# Altium PCB ROS_CAR.PcbDoc (part 13 of 13)
Units mil, origin at the board's own origin, x right, y up, seen from the top; angles counter-clockwise.
Board outline 3937.01 x 3937.01 mil, 2 copper layers (Top Layer, Bottom Layer); 201 components, 155 nets, 998 pads, 0 vias.
Unrouted connection lines stored in the file: 3.
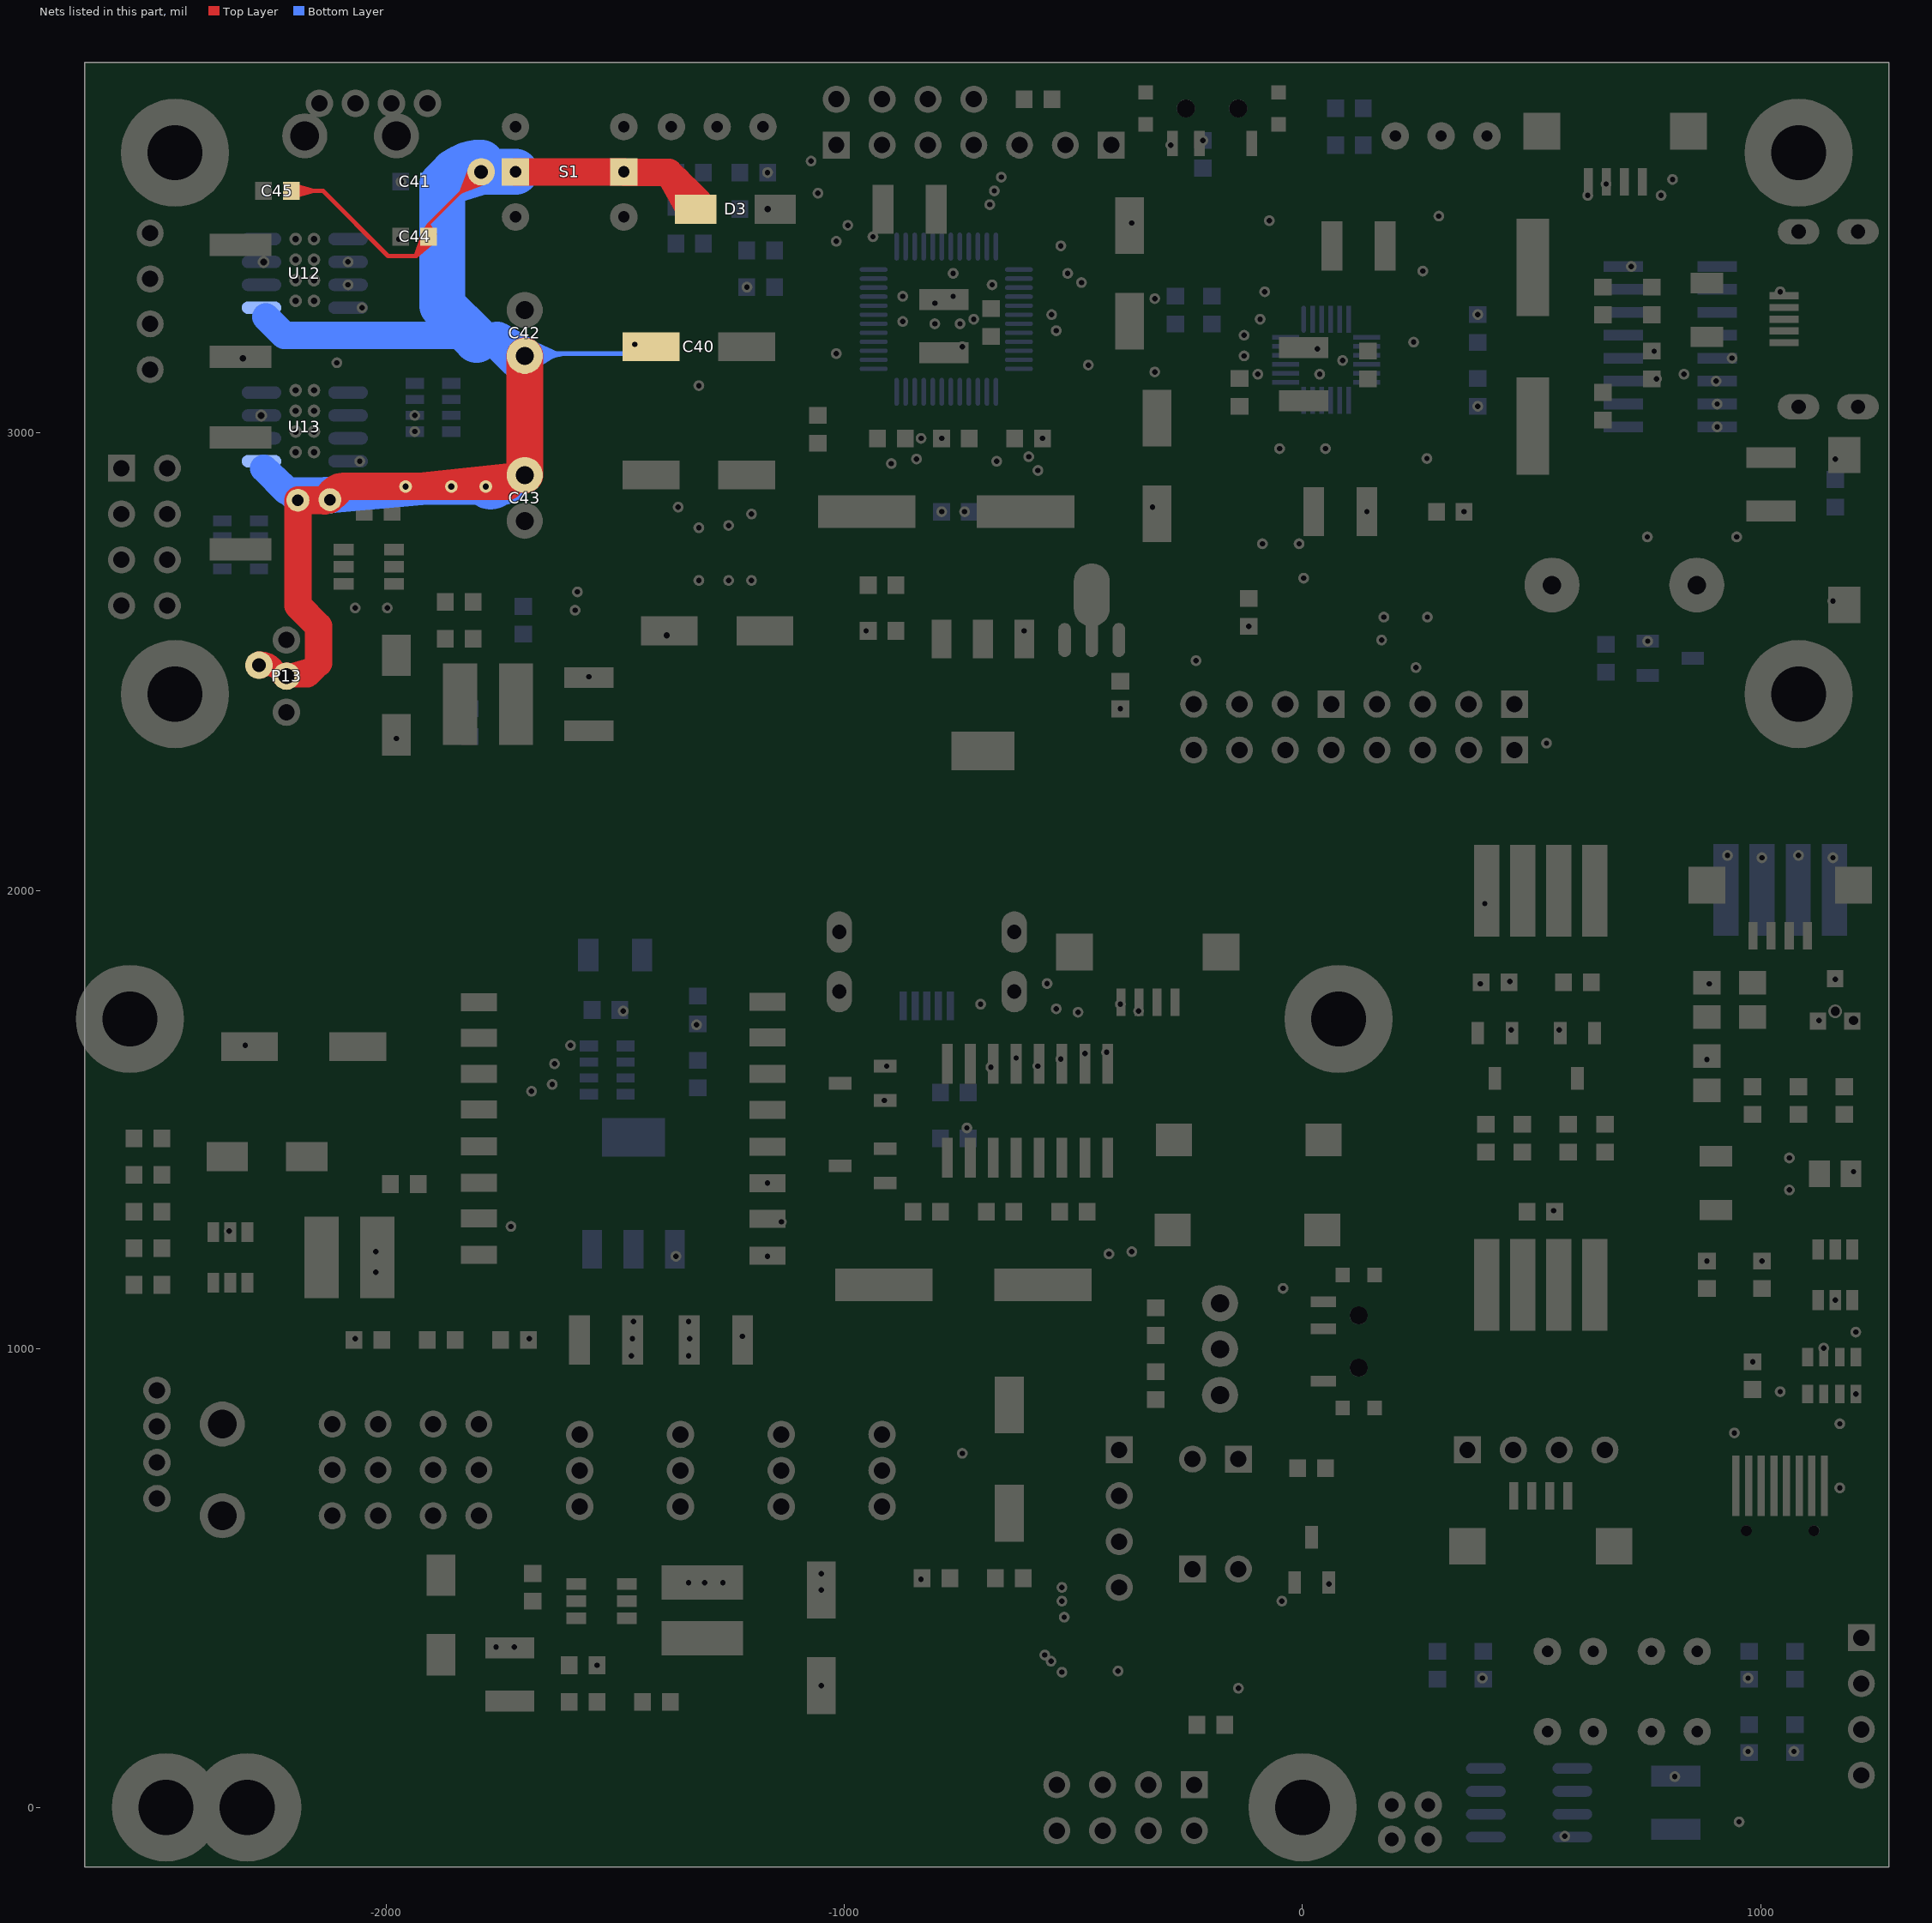
[diagram p13: the nets of this part, all layers, seen from the top]

## Nets (pads, with @x,y where several pads share a name; then routed paths per layer and width w, separated by ;. In a path a pad name is that pad's centre, name@x,y a point inside that pad or via, vN(x,y) a via of type N, cw(c..) or ccw(c..) an arc to the next point about the centre after c; other vN are vias at no path point) (continued)
VINM9V: C40.1 C41.1 C42.1 C43.1 C44.1 C45.1 D3.1 P13.2 pad.0@-1792.48,3568.66 pad.1@-1457.48,3192.09 pad.3 pad.11@-1782.48,2882.09 pad.11@-1857.48,2882.09 pad.11@-1957.48,2882.09 pad.11@-2122.48,2853.3 pad.11@-2192.48,2852.09 S1.1 U12.5 U13.5 | length 14288.3
  Top Layer w7: C44.1@-1921.35,3432.3 -1907.16,3453.98 ; C44.1@-1914.88,3429.25 -1907.16,3453.98 ; C44.1@-1914.68,3440.83 ccw(c-1922.42,3453.98) -1907.16,3453.98 ; C44.1@-1907.16,3427.09 -1907.16,3453.98 ; C44.1@-1907.16,3428.07 -1907.16,3453.98 ; C44.1@-1899.65,3440.83 cw(c-1891.91,3453.98) -1907.16,3453.98 ; C44.1@-1899.45,3429.25 -1907.16,3453.98 ; C44.1@-1892.97,3432.3 -1907.16,3453.98 ; pad.0@-1818.98,3568.66 cw(c-1882.96,3568.66) -1837.72,3523.42 cw(c-1792.48,3478.18) pad.0@-1792.48,3542.16 ; pad.0@-1814.72,3583.07 -1837.33,3523.81 ; pad.0@-1811.98,3568.66 cw(c-1859.06,3568.66) -1825.77,3535.37 cw(c-1792.48,3502.08) pad.0@-1792.48,3549.16 ; pad.0@-1808.22,3580.17 -1837.33,3523.81 ; pad.0@-1804.98,3568.66 cw(c-1835.16,3568.66) -1813.82,3547.32 cw(c-1792.48,3525.98) pad.0@-1792.48,3556.16 ; pad.0@-1802.15,3576.59 -1837.33,3523.81 ; pad.0@-1796.53,3572.38 -1837.33,3523.81 ; pad.0@-1792.48,3568.66 -1907.16,3453.98 ; pad.0@-1788.76,3564.61 -1837.33,3523.81 ; pad.0@-1784.56,3558.99 -1837.33,3523.81 ; pad.0@-1780.98,3552.92 -1837.33,3523.81 ; pad.0@-1778.07,3546.42 -1837.33,3523.81
  Top Layer w10: C45.1@-2207.17,3527.09 -2137.48,3527.09 -1995.48,3385.09 -1934.48,3385.09 ; C45.1@-2205.33,3513.91 -2158.86,3527.09 C45.1@-2205.33,3540.27 ; C45.1@-2197.76,3517.68 cw(c-2175.04,3494.96) -2175.04,3527.09 cw(c-2175.04,3559.21) C45.1@-2197.76,3536.5 ; -1927.63,3391.94 ccw(c-1949.29,3413.6) C44.1@-1919.92,3422.32 ; C44.1@-1919.13,3431.92 -1934.48,3385.09 ; -1915.75,3403.82 ccw(c-1930.97,3419.04) C44.1@-1910.33,3425.16 ; C44.1@-1907.16,3426.1 -1934.48,3385.09 ; C44.1@-1902.48,3417.09 -1934.48,3385.09 ; C44.1@-1897.19,3417.3 -1934.48,3385.09 ; C42.1@-1697.48,3167.09 C42.1@-1677.48,3187.09
  Top Layer w20: pad.11@-2122.48,2853.3 -2122.48,2862.09 pad.11@-2112.48,2862.09 ; -1732.48,2882.09 C43.1@-1697.48,2917.09
  Top Layer w30: pad.3@-2292.48,2492.09 -2287.48,2487.09 pad.3@-2277.48,2492.09 ; pad.3@-2279.1,2507 cw(c-2274.41,2463.74) -2243.64,2494.51 ; pad.3@-2269.58,2479.34 cw(c-2249.73,2447.32) P13.2@-2223.09,2473.96 ; pad.3@-2266.87,2481.48 cw(c-2241.27,2455.87) -2241.27,2492.09 cw(c-2241.27,2528.3) pad.3@-2266.87,2502.69 ; P13.2@-2231.15,2462.17 ccw(c-2277.48,2441.26) pad.3@-2277.48,2492.09 ; P13.2@-2206.87,2457.74 cw(c-2181.27,2432.13) -2181.27,2468.35 cw(c-2181.27,2504.56) P13.2@-2206.87,2478.95 ; -2171.22,2468.35 P13.2@-2217.48,2468.35 ; pad.3@-2277.48,2492.09 P13.2@-2217.48,2468.35 ; pad.3@-2277.48,2492.09 P13.2@-2217.48,2468.35 ; pad.3@-2277.48,2492.09 P13.2@-2217.48,2468.35 ; pad.3@-2277.48,2492.09 -2241.22,2492.09 ; pad.3@-2277.48,2492.09 P13.2@-2217.48,2468.35 ; pad.3@-2277.48,2492.09 -2241.22,2492.09 ; -2241.22,2492.09 P13.2@-2217.48,2468.35
  Top Layer w50: P13.2@-2215.77,2473.05 ccw(c-2195.15,2529.75) -2152.48,2487.09 ; -2152.48,2487.09 P13.2@-2217.48,2468.35 -2171.22,2468.35 -2152.48,2487.09
  Top Layer w60: -2192.48,2647.09 pad.11@-2192.48,2852.09 ; -2147.48,2497.09 -2147.48,2577.09 -2192.48,2622.09 pad.11@-2192.48,2852.09 ; pad.11@-2134.04,2850.53 -2135.6,2852.09 pad.11@-2192.48,2852.09 ; pad.11@-2127.35,2854.44 cw(c-2092.48,2846.28) -2092.48,2882.09 ; pad.11@-2112.48,2862.09 -2092.48,2882.09 ; -1935.41,2882.09 C43.1@-1697.48,2907.09 ; pad.11@-1780.46,2882.09 ccw(c-1780.46,2990.06) C43.1@-1704.11,2913.71 ; -1732.48,2882.09 -2092.48,2882.09 ; S1.1@-1717.48,3568.66 S1.1@-1481.26,3568.66 ; -1365.46,3550.06 cw(c-1428.43,3487.09) D3.1@-1339.37,3487.09 ; D3.1@-1337.87,3487.09 -1382.48,3567.09 ; D3.1@-1317.48,3502.09 -1382.48,3567.09 ; pad.11@-2192.48,2852.09 pad.11@-2122.48,2853.3 ; pad.11@-2122.48,2853.3 -2092.48,2882.09 ; pad.11@-2122.48,2853.3 -2092.48,2882.09 ; S1.1@-1481.26,3568.66 -1382.48,3567.09 ; S1.1@-1481.26,3568.66 -1479.69,3567.09 -1382.48,3567.09
  Top Layer w80: C42.1@-1697.48,3167.09 C43.1@-1697.48,2907.09 C42.1@-1697.48,3167.09 ; C42.1@-1697.48,3167.09 -1697.48,2917.09 C42.1@-1697.48,3167.09
  Bottom Layer w10: C42.1@-1697.48,3167.09 -1627.87,3172.09 ; C42.1@-1697.03,3181.45 -1627.87,3172.09 ; C42.1@-1694.98,3152.94 -1627.87,3172.09 ; C42.1@-1694.96,3191.33 -1627.87,3172.09 ; C42.1@-1692.48,3172.09 -1477.48,3172.09 ; C42.1@-1691.52,3143.46 -1627.87,3172.09 ; C42.1@-1691.43,3200.92 -1627.87,3172.09 ; C42.1@-1687.32,3156.93 cw(c-1650.72,3120.32) -1650.72,3172.09 cw(c-1650.72,3213.85) C42.1@-1680.25,3184.32 ; C42.1@-1686.65,3134.47 -1627.87,3172.09 ; C42.1@-1680.25,3149.85 cw(c-1626.58,3096.18) -1626.58,3172.09 cw(c-1626.57,3237.99) C42.1@-1673.18,3191.39 ; C42.1@-1673.18,3142.78 cw(c-1602.43,3072.04) -1602.43,3172.09 ; pad.1@-1464.29,3192.09 cw(c-1480.73,3192.09) -1469.11,3180.46 cw(c-1457.48,3168.83) pad.1@-1457.48,3185.28 ; pad.1@-1462.84,3196.29 -1477.48,3172.09 ; pad.1@-1453.28,3186.73 -1477.48,3172.09 ; -1477.48,3172.09 pad.1@-1457.48,3192.09 -1477.48,3172.09
  Bottom Layer w60: -2262.48,3252.09 -2222.48,3212.09 -1852.48,3212.09 ; pad.11@-2196.02,2855.62 cw(c-2156.27,2815.87) -2156.27,2872.09 ; -2155.77,2872.09 cw(c-2155.77,2820.01) pad.11@-2118.94,2856.83 ; pad.11@-2126.02,2856.83 cw(c-2089.19,2820.01) -2089.19,2872.09 ; -2054.28,2872.09 pad.11@-1857.48,2882.09 ; -1979.32,2872.09 pad.11@-1782.48,2882.09 ; -1928.44,2872.09 C43.1@-1697.48,2907.09 ; -1911.94,2872.09 pad.11@-2122.48,2853.3 ; -1804.6,2872.09 ccw(c-1804.6,3014.21) C43.1@-1704.11,2913.71 ; -1802.48,3202.09 -1757.48,3202.09 ; -1792.43,2869.28 ccw(c-1771.55,2896.15) -1747.48,2872.09 ; -1739.08,2880.48 cw(c-1697.48,2838.88) C43.1@-1697.48,2897.72 ; C42.1@-1712.48,3157.09 C42.1@-1692.48,3157.09 ; C43.1@-1706.78,2908.2 cw(c-1747.48,2913.07) -1747.48,2872.09 ; -2217.48,2872.09 pad.11@-2122.48,2853.3 ; -2217.48,2872.09 -2267.48,2922.09 pad.11@-2192.48,2852.09 ; -2217.48,2872.09 -1747.48,2872.09 ; pad.11@-2192.48,2852.09 pad.11@-2122.48,2853.3 ; pad.11@-2192.48,2852.09 pad.11@-2122.48,2853.3 ; pad.11@-2192.48,2852.09 pad.11@-2122.48,2853.3 ; pad.11@-2192.48,2852.09 -2154.2,2872.09 ; pad.11@-2192.48,2852.09 -1987.89,2880.54 pad.11@-2122.48,2853.3 ; pad.11@-2192.48,2852.09 -1984.04,2872.09 pad.11@-2122.48,2853.3 ; -2154.2,2872.09 pad.11@-2122.48,2853.3 ; -2154.2,2872.09 pad.11@-2122.48,2853.3 ; -2154.2,2872.09 pad.11@-1957.48,2882.09 ; pad.11@-2122.48,2853.3 pad.11@-1957.48,2882.09 ; pad.11@-1957.48,2882.09 pad.11@-1782.48,2882.09 ; pad.11@-1957.48,2882.09 pad.11@-1857.48,2882.09 ; pad.11@-1957.48,2882.09 -1760.83,2872.09 ; pad.11@-1857.48,2882.09 C43.1@-1697.48,2907.09 ; pad.11@-1857.48,2882.09 pad.11@-1782.48,2882.09 ; pad.11@-1857.48,2882.09 pad.11@-1782.48,2882.09 ; pad.11@-1857.48,2882.09 -1760.83,2872.09 ; pad.11@-1857.48,2882.09 -1747.48,2872.09 ; pad.11@-1782.48,2882.09 C43.1@-1697.48,2907.09 ; pad.11@-1782.48,2882.09 C43.1@-1697.48,2907.09 ; pad.11@-1782.48,2882.09 C43.1@-1697.48,2907.09 ; pad.11@-1782.48,2882.09 C43.1@-1697.48,2907.09 ; pad.11@-1782.48,2882.09 -1747.48,2872.09 ; pad.11@-1782.48,2882.09 C43.1@-1712.48,2907.09 ; pad.11@-1782.48,2882.09 -1747.48,2872.09 ; pad.11@-1782.48,2882.09 -1760.83,2872.09 ; pad.11@-1782.48,2882.09 -1760.83,2872.09 ; pad.11@-1782.48,2882.09 -1747.48,2872.09 ; -1747.48,2872.09 C43.1@-1697.48,2907.09 ; -1747.48,2872.09 C43.1@-1697.48,2907.09 ; -1747.48,2872.09 C43.1@-1697.48,2907.09 ; -1747.48,2872.09 C43.1@-1697.48,2907.09 ; -1747.48,2872.09 C43.1@-1697.48,2907.09 ; -1747.48,2872.09 C43.1@-1697.48,2907.09 ; -1747.48,2872.09 C43.1@-1712.48,2907.09 ; C43.1@-1712.48,2907.09 C43.1@-1697.48,2907.09
  Bottom Layer w80: -1739.08,3183.69 ccw(c-1697.48,3225.29) C42.1@-1697.48,3166.46 ; C42.1@-1712.48,3157.09 -1757.48,3202.09 C42.1@-1697.48,3167.09
  Bottom Layer w100: -1802.48,3202.09 -1877.48,3277.09 -1877.48,3542.09 ; -1877.48,3542.09 pad.0@-1792.48,3568.66 ; -1877.48,3542.09 -1850.91,3568.66 ; -1850.91,3568.66 pad.0@-1792.48,3568.66 ; -1850.91,3568.66 pad.0@-1792.48,3568.66 ; -1850.91,3568.66 pad.0@-1792.48,3568.66 ; -1850.91,3568.66 S1.1@-1717.48,3568.66 -1850.91,3568.66 ; -1858.08,3561.49 cw(c-1792.48,3495.89) -1792.48,3588.66 ccw(c-1792.48,3495.89) -1858.08,3561.49
pads on no net: G1.0 G2.0 OLED1.0 P5.7 P6.0 P6.2 P12. P14. P17.0 P17.2 P27. P30. S2. S3. U2.6 U3.40 U6.4 U7.2 U7.3 U7.4 U7.5 U7.6 U7.7 U7.14 U7.15 U7.16 U7.17 U7.19 U7.21 U7.22 U8.9 U8.10 U8.11 U8.12 U8.13 U8.14 U8.15 U14.4 U15.9 U15.10 U15.11 U15.12 U15.15 U17.7
copper on no net: | length 19.1
  Bottom Layer w12: -1440,1465 -1430,1455 -1425,1455

## Polygon pours and split planes (outlines as drawn)
SGND on Top Overlay "Top Overlay-No Net" (solid, shelved, pour order 1003): 810,2155.08 810.08,2155 1279.53,2155
SGND on Bottom Layer "Bottom Layer-No Net 1" (solid, shelved, pour order 1001): 80,440.33 80,-129.92 -2645,-129.92 -2670,-105.76 -2657.48,-93.66 -2657.48,450
MGND on Bottom Layer "Top Overlay-No Net" (solid, remove dead copper, shelved, pour order 1013): 310,2155.08 755,2155.08 755,955 745.92,945 310,945
SGND on Bottom Layer "Top Overlay-No Net" (solid, remove dead copper, shelved, pour order 1012): -2657.48,1965 -2652.47,1961.34 180,1961.34 180,430 -2657.48,430
GND on Bottom Layer "Top Overlay-No Net" (solid, remove dead copper, shelved, pour order 1011): 145,425 149.92,420.08 1270,420.08 1270,-120.39 1279.53,-129.92 145,-129.92
S_GND on Bottom Layer "Top Overlay-No Net" (solid, remove dead copper, shelved, pour order 1010): 825,2155.08 825.08,2155 1279.53,2155 1279.53,510 825,510
no net on Bottom Layer "Top Overlay-No Net" (hatched 90Degree grid 20 track 8, shelved, pour order 1006): 300,820 715,820 715,525 720,520 715,515 300,515
CGND on Bottom Layer "Top Overlay-No Net" (solid, remove dead copper, shelved, pour order 1000): -2657.48,3807.09 1279.53,3807.09 1279.53,2235 -2657.48,2235
SGND on Top Layer "Bottom Layer-No Net 1" (solid, shelved, pour order 1000): 83.18,467.06 85,465.24 85,-129.92 -2657.48,-129.92 -2657.48,420
MGND on Top Layer "Top Overlay-No Net" (solid, remove dead copper, shelved, pour order 1009): 310,2155.08 755,2155.08 755,955 745.92,945 310,945
SGND on Top Layer "Top Overlay-No Net" (solid, remove dead copper, shelved, pour order 1008): -2657.48,1965 -2652.47,1961.31 180,1961.31 180,420 -2657.48,420
GND on Top Layer "Top Overlay-No Net" (solid, remove dead copper, shelved, pour order 1007): 145,425 149.92,420.08 1270,420.08 1270,-120.39 1279.53,-129.92 145,-129.92
S_GND on Top Layer "Top Overlay-No Net" (solid, remove dead copper, shelved, pour order 1004): 825,2155.08 825.08,2155 1279.53,2155 1279.53,510 825,510
no net on Top Layer "Top Overlay-No Net" (hatched 90Degree grid 20 track 8, shelved, pour order 1005): 300,820 715,820 715,525 720,520 715,515 300,515
CGND on Top Layer "Top Overlay-No Net" (solid, remove dead copper, shelved, pour order 1001): -2657.48,3807.09 1279.53,3807.09 1279.53,2230 -2652.48,2230 -2657.48,2235

## Keep-outs
Keep-Out Layer:
  circle w5: c235.39,153.15 r40
  circle w5: c1066.1,-11.81 r40
  circle w5: c245,545 r40
  circle w5: c755,480 r40
  circle w5: c740,870 r40
  circle w5: c240,785 r40
  lines w3.94: -2657.48,1487.61 cw(c-2326.19,1487.61) -2560.45,1721.86 ; -2657.48,1497.11 cw(c-2335.69,1497.11) -2563.23,1724.65 ; -2657.48,1506.61 cw(c-2345.2,1506.61) -2566.01,1727.43 ; -2657.48,1516.12 cw(c-2354.7,1516.12) -2568.8,1730.22 ; -2657.48,1525.62 cw(c-2364.21,1525.62) -2571.58,1733 ; -2657.48,1535.13 cw(c-2373.71,1535.13) -2574.37,1735.78 ; -2657.48,1544.63 cw(c-2383.22,1544.63) -2577.15,1738.57 ; -2657.48,1554.14 cw(c-2392.72,1554.14) -2579.93,1741.35 ; -2657.48,1563.64 cw(c-2402.23,1563.64) -2582.72,1744.14 ; -2657.48,1573.15 cw(c-2411.73,1573.15) -2585.5,1746.92 ; -2657.48,1582.65 cw(c-2421.24,1582.65) -2588.29,1749.7 ; -2657.48,1592.16 cw(c-2430.74,1592.16) -2591.07,1752.49 ; -2657.48,1601.66 cw(c-2440.25,1601.66) -2593.85,1755.27 ; -2657.48,1611.17 cw(c-2449.75,1611.17) -2596.64,1758.05 ; -2657.48,1620.67 cw(c-2459.25,1620.67) -2599.42,1760.84 ; -2657.48,1782.25 cw(c-2620.84,1782.25) -2646.75,1808.16 ; -2657.48,1782.25 ccw(c-2497.27,1782.25) -2610.56,1668.97 ; -2657.48,1820.27 ccw(c-2459.25,1820.27) -2599.42,1680.11 ; -2657.48,1829.78 ccw(c-2449.75,1829.78) -2596.64,1682.89 ; -2657.48,1839.28 ccw(c-2440.25,1839.28) -2593.85,1685.67 ; -2657.48,1848.79 ccw(c-2430.74,1848.79) -2591.07,1688.46 ; -2657.48,1858.29 ccw(c-2421.24,1858.29) -2588.29,1691.24 ; -2657.48,1867.8 ccw(c-2411.73,1867.8) -2585.5,1694.03 ; -2657.48,1877.3 ccw(c-2402.23,1877.3) -2582.72,1696.81 ; -2657.48,1886.81 ccw(c-2392.72,1886.81) -2579.93,1699.59 ; -2657.48,1896.31 ccw(c-2383.22,1896.31) -2577.15,1702.38 ; -2657.48,1905.82 ccw(c-2373.71,1905.82) -2574.37,1705.16 ; -2657.48,1915.32 ccw(c-2364.21,1915.32) -2571.58,1707.95 ; -2657.48,1924.83 ccw(c-2354.7,1924.83) -2568.8,1710.73 ; -2657.48,1934.33 ccw(c-2345.2,1934.33) -2566.01,1713.51 ; -2657.48,1943.83 ccw(c-2335.69,1943.83) -2563.23,1716.3 ; -2657.48,1953.34 ccw(c-2326.19,1953.34) -2560.45,1719.08 ; -2655.1,1624.43 cw(c-2649.35,1630.18) -2657.48,1630.18 cw(c-2468.76,1630.18) -2602.21,1763.62 ; -2655.1,1816.52 ccw(c-2649.35,1810.77) -2657.48,1810.77 ccw(c-2468.76,1810.77) -2602.21,1677.32 ; -2652.32,1627.21 cw(c-2639.85,1639.68) -2657.48,1639.68 cw(c-2478.26,1639.68) -2604.99,1766.41 ; -2652.32,1813.73 ccw(c-2639.85,1801.26) -2657.48,1801.26 ccw(c-2478.26,1801.26) -2604.99,1674.54 ; -2649.53,1630 cw(c-2630.34,1649.19) -2657.48,1649.19 cw(c-2487.77,1649.19) -2607.77,1769.19 ; -2649.53,1810.95 ccw(c-2630.34,1791.76) -2657.48,1791.76 ccw(c-2487.77,1791.76) -2607.77,1671.75 ; -2646.75,1632.78 cw(c-2620.84,1658.69) -2657.48,1658.69 cw(c-2497.27,1658.69) -2610.56,1771.97 ; -2643.96,1635.56 cw(c-2611.33,1668.2) -2657.48,1668.2 cw(c-2506.78,1668.2) -2613.34,1774.76 ; -2643.96,1805.38 ccw(c-2611.33,1772.75) -2657.48,1772.75 ccw(c-2506.78,1772.75) -2613.34,1666.19 ; -2641.18,1638.35 cw(c-2601.83,1677.7) -2657.48,1677.7 cw(c-2516.28,1677.7) -2616.12,1777.54 ; -2641.18,1802.6 ccw(c-2601.83,1763.24) -2657.48,1763.24 ccw(c-2516.28,1763.24) -2616.12,1663.4 ; -2638.4,1641.13 cw(c-2592.32,1687.21) -2657.48,1687.21 cw(c-2525.79,1687.21) -2618.91,1780.33 ; -2638.4,1799.81 ccw(c-2592.32,1753.74) -2657.48,1753.74 ccw(c-2525.79,1753.74) -2618.91,1660.62 ; -2635.61,1643.92 cw(c-2582.82,1696.71) -2657.48,1696.71 cw(c-2535.29,1696.71) -2621.69,1783.11 ; -2635.61,1797.03 ccw(c-2582.82,1744.23) -2657.48,1744.23 ccw(c-2535.29,1744.23) -2621.69,1657.84 ; -2632.83,1646.7 cw(c-2573.31,1706.22) -2657.48,1706.22 cw(c-2544.8,1706.21) -2624.48,1785.89 ; -2632.83,1794.25 ccw(c-2573.31,1734.73) -2657.48,1734.73 ccw(c-2544.8,1734.73) -2624.48,1655.05 ; -2630.04,1649.48 cw(c-2563.81,1715.72) -2657.48,1715.72 cw(c-2554.3,1715.72) -2627.26,1788.68 ; -2630.04,1791.46 ccw(c-2563.81,1725.22) -2657.48,1725.22 ccw(c-2554.3,1725.23) -2627.26,1652.27 ; -2657.48,-129.92 1279.53,-129.92 1279.53,3807.09 -2657.48,3807.09 -2657.48,-129.92
  lines w5: -2657.48,1980 -1300,1980 -1300,2237.09 ; -2655.48,3607.12 cw(c-2460.63,3610.24) -2467.41,3804.99 ; -2655.35,2423.22 ccw(c-2460.6,2430) -2457.48,2235.15 ; -2457.48,2234.21 -1300,2234.21 ; -2045,-129.92 -2015,-99.92 -2015,90 -1995,110 -1915,110 -630,110 -610,90 -610,-109.92 -590,-129.92 ; 180,2154.05 755,2154.05 ; 180,2155.08 180,2234.21 1089.45,2234.21 ccw(c1082.68,2428.97) 1277.53,2432.09 ; 756.03,2154.05 1240,2154.05 cw(c1240,2115) 1278.74,2110.1 ; 884.53,510.47 884.53,510.08 ; 1079.56,3805.08 cw(c1082.68,3610.24) 1277.43,3617.01 ; 1279.53,420.08 879.53,420.08 879.53,505.08 884.53,510.08 ; 1279.8,555.95 cw(c1233.93,555.95) 1233.93,510.08 884.53,510.08 ; -2097.48,3532.09 -2097.48,3665 -2057.48,3665 -2057.48,3532.09 -2097.48,3532.09 ; 904.53,540.08 1189.53,540.08 1189.53,570.08 904.53,570.08 904.53,540.08

## Other copper
Top Layer:
  rectangle net SGND: -1615.99,610 -879.25,682.55
  rectangle net SGND: -2160,590 -1745,670
  rectangle net CGND: -2095,3695 -2050,3710
  rectangle net CGND: -2260,2565.95 -2229.95,2600
  rectangle net CGND: -2280,2535.67 -2214.68,2582.97
  rectangle net CGND: -2185,3695 -2045,3750
  rectangle net CGND: -2230,2920 -2134.96,3152.09
  rectangle net CGND: -2222.6,3257.09 -2125,3462.09
  rectangle net VINM9V: -2277.48,2435 -2120,2505
Bottom Layer:
  rectangle net SGND: -1625,610 -905,680
  rectangle net CGND: -2275,2540.27 -2225.27,2600
  rectangle net CGND: -2245,2525 -2180,2595
  rectangle net SGND: -2555,720 -2470,780
  rectangle net SGND: -2535,630 -2470,720
  rectangle net SGND: -2420,585 -2305,695
  rectangle net SGND: -2160,590 -1755,670
  rectangle net CGND: -2185,3685 -2040,3755
  rectangle net VCCSBAT: -2265,685 -1675,785
  rectangle net VCCSBAT: -1675,695 -890,775

## Silkscreen, mask and mechanical layers (free items; w line width, h text height)
Top Overlay:
  lines w5: -2657.48,1976.38 172.17,1976.38 ; -2657.48,2232.28 1279.53,2232.28 ; 140.91,-126.3 140.91,421.26 1164.53,421.26 1164.53,-129.92 ; 172.17,2105.08 177.17,2110.08 ; 174.8,2227.09 180,2232.28 ; 177.17,-129.92 177.17,2232.28 ; 1279.53,527.09 877.52,527.09 812.52,592.09 812.52,2117.28 862.52,2167.28 1232.32,2167.28 1279.53,2120.08 1279.53,2115.08
  lines w10: -2292.48,2472.09 -2292.48,2637.09 -2152.48,2777.09 -2152.48,3202.09 -1792.48,3562.09 -1792.48,3568.66
  lines w20: -1715,1976.38 179.8,1976.38 ; -1300,2227.09 174.8,2227.09 ; 145,425 879.61,425
  lines w30: 805,600 805,2155.08
  lines w39.37: 145,-129.92 145,425 ; 225,950 795,950 ; 270,950 270,2155.08
  text "GND" at -2240,3730 h45
  text "CLK" at -490,3705 h45
  text "GND" at -55.47,3635.08 h45 r270
  text "3.3" at -295.47,3520.08 h45 r90
  text "DIO" at -585,3455 h45 r90
  text "GND" at -495.47,3445.08 h45 r90
  text "GND" at -1000,3435 h45 r90
  text "5v" at -2575,3010 h45 r90
  text "GND" at -2405,3000 h45 r90
  text "RST" at 1064.53,2645.08 h45 r90
  text "GND" at -2245,2635 h45
  text "5v" at -2345,2575 h45 r90
  text "-" at -1990,2560 h50
  text "5v" at -230,2490 h45 r90
  text "GND" at 180,2485 h45 r90
  text "GND" at 85,2480 h45 r90
  text "TX" at 225,2475 h45
  text "RX" at 330,2475 h45
  text "GND" at -2595,2465 h45 r90
  text "5v" at 575,2375 h45 r90
  text "5v" at 580,2275 h45 r90
  text "GND" at 365,1950 h45 r90
  text "GND" at 834.53,1845.08 h45
  text "SCL" at -105,1765 h40 r270
  text "GND" at -465,1760 h40 r270
  text "SDA" at -180,1760 h40 r270
  text "3.3" at -245,1755 h40 r270
  text "-" at -2090,1410 h40 r90
  text "GND" at 365,1095 h45 r90
  text "GND" at 1194.53,760.08 h45 r270
  text "TX" at -500.08,720 h45 r270
  text "3.3" at 904.53,650.08 h45 r90
  text "RX" at -500.08,615 h45 r270
  text "GND" at 1029.53,250.08 h45
  text "GND" at 209.53,50.08 h45 r90
  text "5v" at 360,-95 h45 r90
Bottom Overlay:
  lines w5: 1025,80 1030,75 1125,75 1130,80 1130,380 1120,390 1025,390 1025,80
  lines w20: -1300,2230 174.8,2227.09 ; 145,425 874.61,425 ; 805,600 870,535
  lines w30: 805,600 805,2155.08
  lines w39.37: 145,-129.92 145,425
  text "GND" at -2120,3730 h45
  text "CLK" at -400,3570 h45 r90
  text "GND" at -495,3565 h45 r90
  text "GND" at -70,3525 h40 r270
  text "CS" at -910,3515 h30 r90
  text "MO" at -810,3515 h30 r90
  text "IR" at -700,3515 h30 r90
  text "DIO" at -610,3510 h45 r90
  text "3.3" at -1010,3495 h30 r90
  text "GND" at -980,3480 h45 r90
  text "MI" at -695,3450 h30 r90
  text "CE" at -915,3445 h30 r90
  text "RX" at -1060,3435 h45 r90
  text "SC" at -800,3435 h30 r90
  text "TX" at -1060,3340 h45 r90
  text "GND" at -2415,3085 h45 r90
  text "5v" at -2580,3060 h45 r90
  text "PA3" at -105,2745 h40 r90
  text "PA2" at -15,2745 h40 r90
  text "5v" at -205,2735 h45 r90
  text "GND" at 80,2735 h45 r90
  text "GND" at 180,2735 h45 r90
  text "5v" at -2335,2635 h45 r90
  text "5V" at 485,2625 h40
  text "TX" at 295,2620 h45
  text "RX" at 400,2620 h45
  text "PC15" at -20,2615 h40 r90
  text "INT" at -200,2595 h40 r90
  text "GND" at -2595,2585 h45 r90
  text "EN" at 80,2585 h40 r90
  text "SDA" at 170,2580 h40 r90
  text "GND" at -1985,2535 h45
  text "SCL" at 295,2510 h40
  text "GND" at 425,2510 h40
  text "5V" at 530,2505 h40
  text "GND" at 365,2070 h45 r90
  text "5v" at 505,2050 h45 r90
  text "SCL" at 1145,1772.09 h40 r270
  text "GND" at 900,1770 h40 r270
  text "VCC" at 980,1762.09 h40 r270
  text "SDA" at 1075,1760 h40 r270
  text "GND" at 589.92,1440 h45
  text "GND" at 365,1215 h45 r90
  text "5v" at 505,1165 h45 r90
  text "5V" at -505,760 h40 r270
  text "TX" at -500.08,645 h45 r270
  text "RX" at -500.08,540 h45 r270
  text "GND" at -510,410 h40 r270
  text "GND" at 205,170 h45 r90
Bottom Solder:
  rectangle: -2202.48,3272.09 -2152.48,3432.09
  rectangle: -2202.48,2947.09 -2157.48,3092.09

## Dimensions
-2657.48,-129.92 to 1279.53,-129.92 on Mechanical 1
-2657.48,-129.92 to -2657.48,3807.09 on Mechanical 1

## Text inside footprints (layer, text, board x,y; h text height)
C9: Mechanical 1 "C1" at -335.19,2948.24 h44 r270
C12: Mechanical 1 "C1" at -1338.64,2889.37 h44
C13: Mechanical 1 "C1" at -395.19,3368.24 h44 r270
C40: Mechanical 1 "C1" at -1338.64,3169.37 h44
C46: Mechanical 1 "C1" at -1298.64,2549.37 h44
C54: Mechanical 1 "C1" at -2201.16,1642.29 h30
C58: Mechanical 1 "C1" at -657.71,781.16 h30 r270
C64: Mechanical 1 "C1" at -1067.71,391.16 h29.53 r270
P2: Top Overlay "2" at -2497.48,3022.09 h44 r270; Top Overlay "1" at -2597.48,3002.09 h44 r270; Top Overlay "7" at -2597.48,2562.09 h44 r270; Top Overlay "8" at -2497.48,2562.09 h44 r270
P8: Top Overlay "2" at -1117.48,3707.09 h44; Top Overlay "1" at -1097.48,3607.09 h44; Top Overlay "7" at -657.48,3607.09 h44; Top Overlay "8" at -657.48,3707.09 h44
P18: Top Overlay "5" at -136.22,-30.72 h50 r180; Top Overlay "1" at -156.22,69.28 h50 r180; Top Overlay "4" at -596.22,69.28 h50 r180; Top Overlay "8" at -596.22,-30.72 h50 r180
P22: Top Overlay "6" at -2097.48,896.38 h50 r90; Top Overlay "5" at -1997.48,896.38 h50 r90; Top Overlay "2" at -2097.48,536.38 h50 r90; Top Overlay "1" at -1997.48,556.38 h50 r90
P28: Top Overlay "6" at -1877.48,896.38 h50 r90; Top Overlay "5" at -1777.48,896.38 h50 r90; Top Overlay "2" at -1877.48,536.38 h50 r90; Top Overlay "1" at -1777.48,556.38 h50 r90
U10: Top Overlay "k" at 549.61,255.35 h40 r90
U11: Top Overlay "k" at 776.38,255.35 h40 r90
U17: Mechanical 13 "CUTOUT POLYGON" at -1792.48,2046.38 h10; Mechanical 13 "ANTENNA AREA" at -1792.48,2066.38 h10